# EAGLE board SOCKET_R_PANELISE (EAGLE 9.2.2)
CIRCULAR-LAYOUT-SETTINGS: 0.000000 0.000000 0.238189 -1.000000 0 0
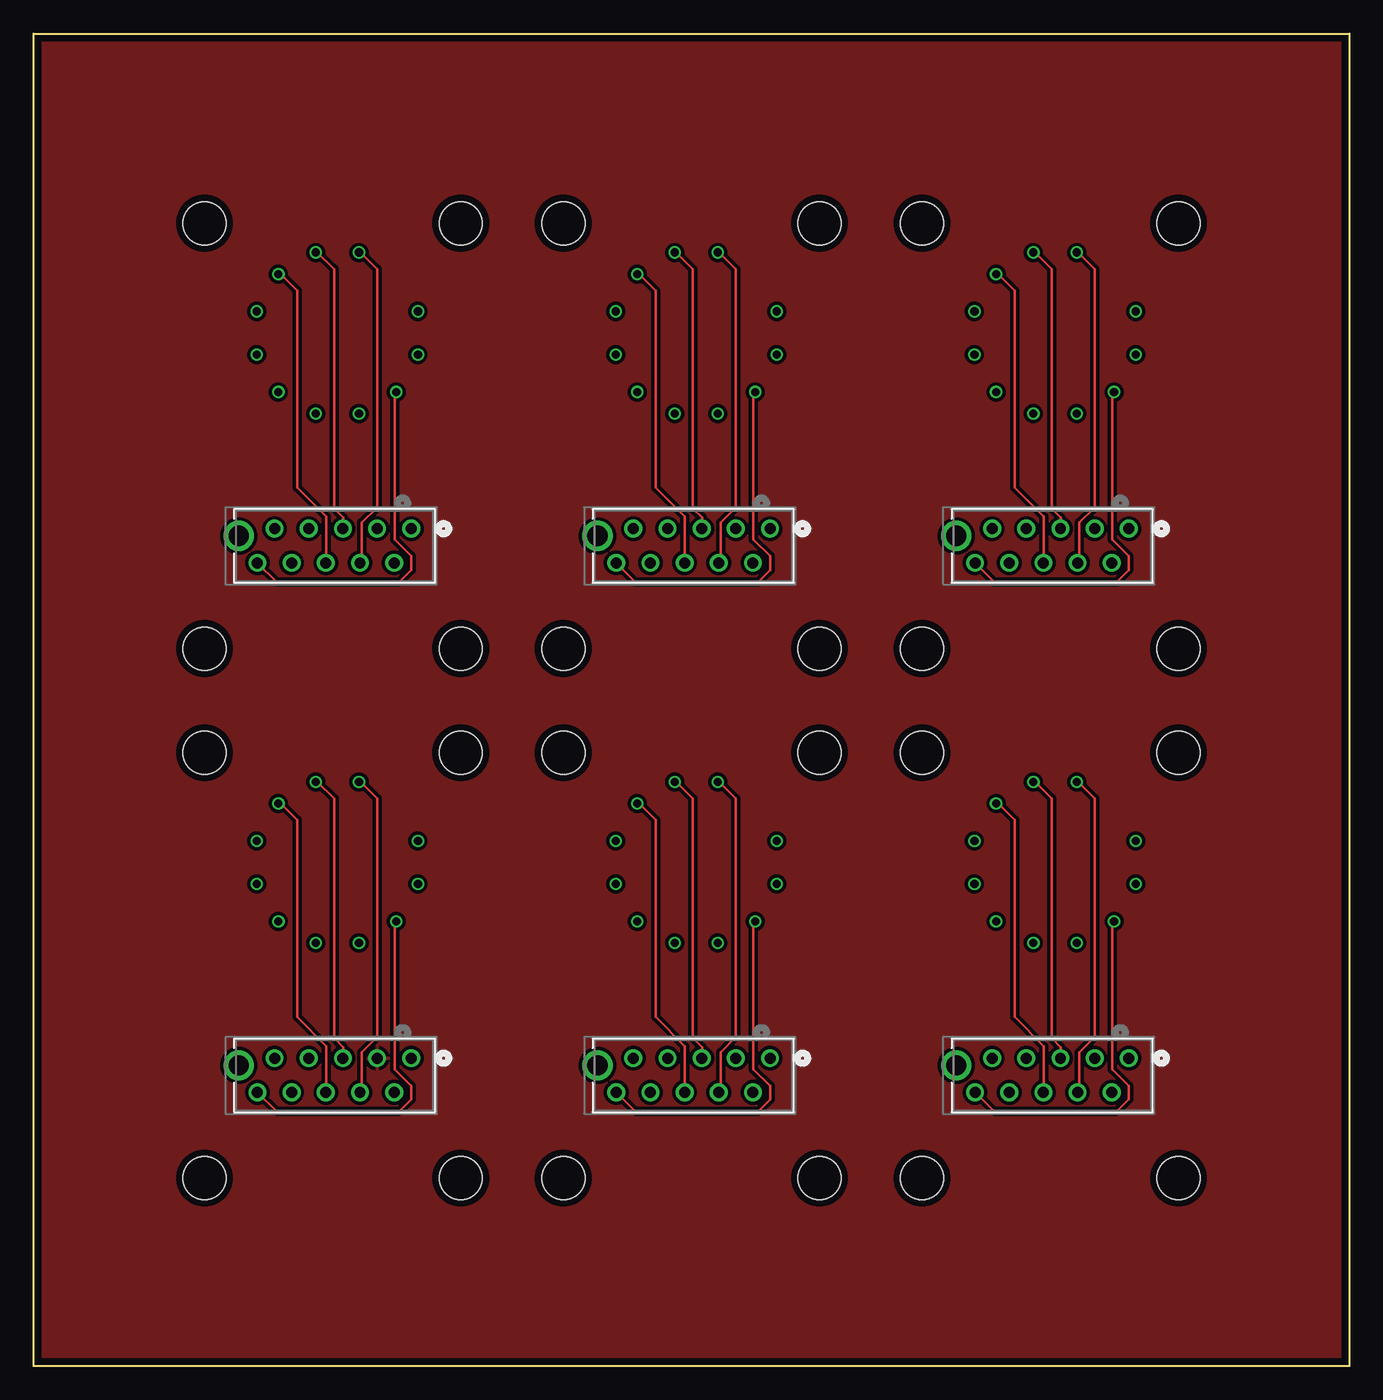
[diagram p0: board, top side]
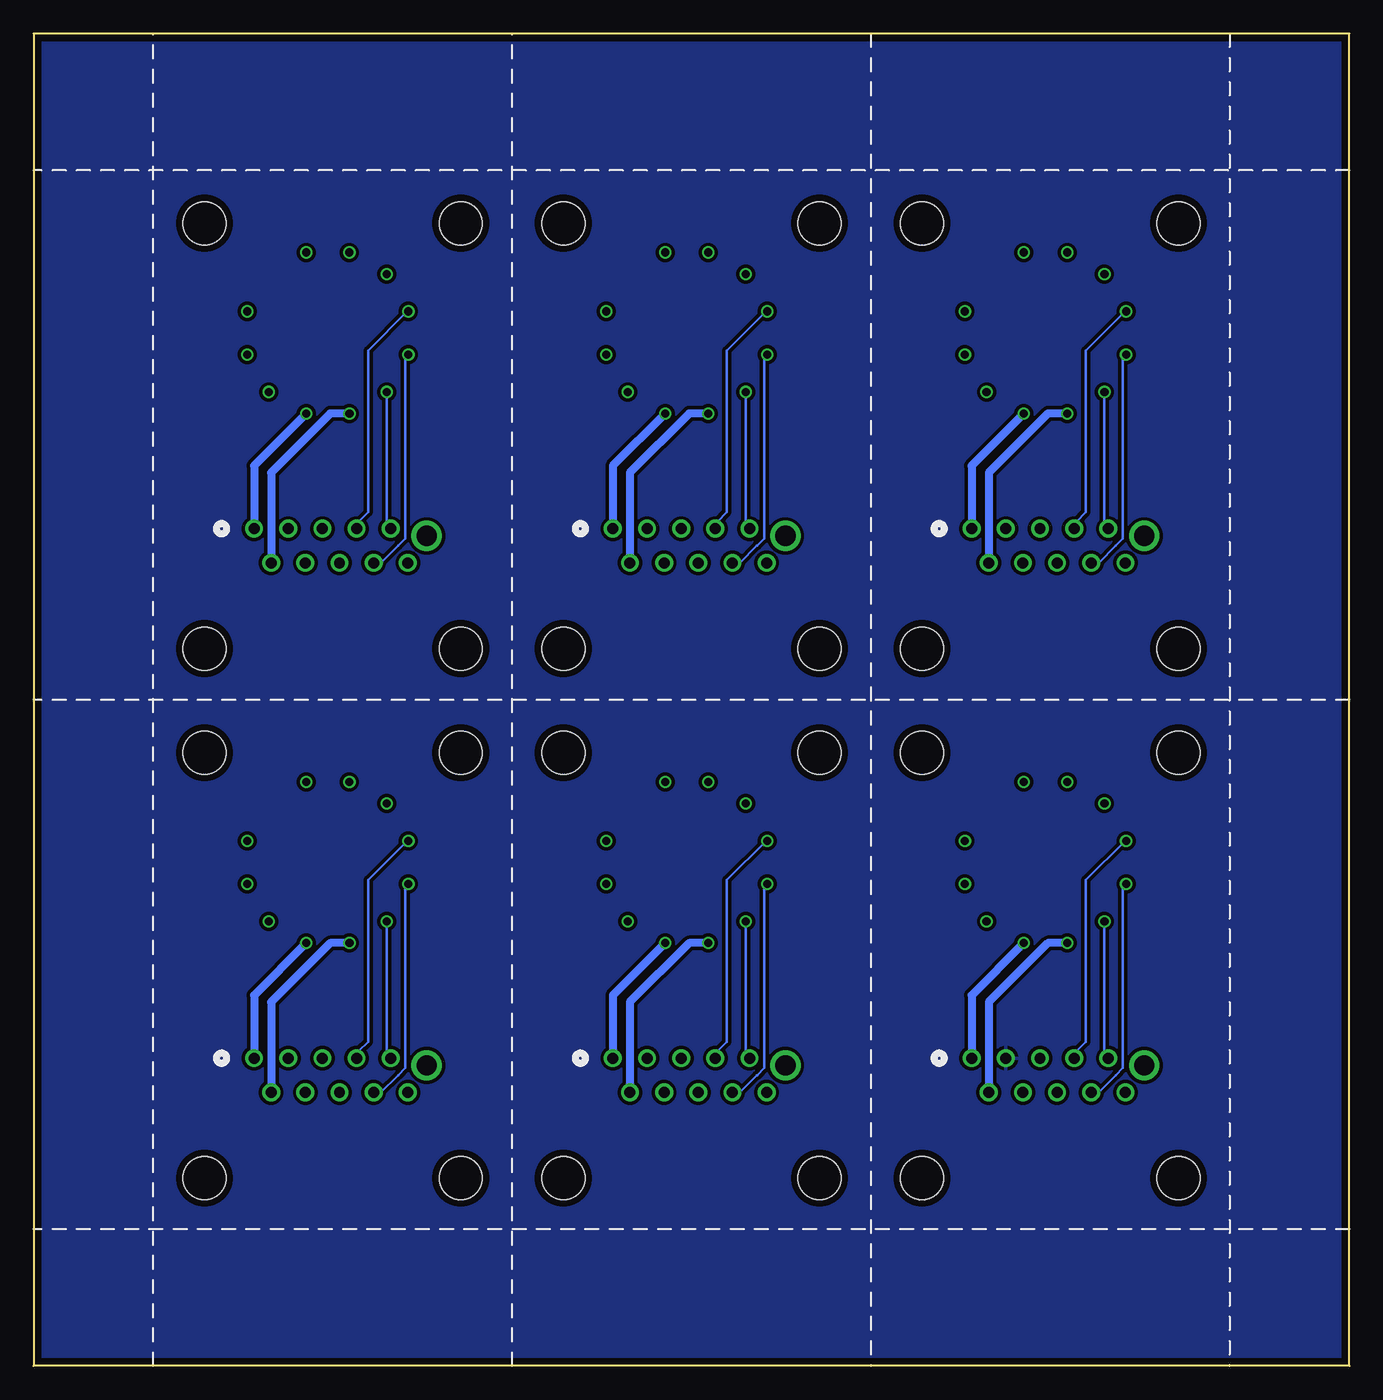
[diagram p1: board, bottom side, seen from below]

Size 97.79 x 99.06 mm. Coordinates in mm from the lower left corner, seen from the top.
Outline: 0,0 97.79,0 97.79,99.06 0,99.06 0,0
Copper layers (1*16): Top 0.035mm / dielectric 1.6mm / Bottom 0.035mm
Design rules "Elecrow_2-layer_PCB_eagle_rule": minimum track width 6mil, minimum drill 12mil, track to track 6mil, track to pad 6mil, pad to pad 6mil, via to via 8mil, smd to smd 0mil, copper to edge 20mil, drill to drill 10mil, minimum pad ring 6mil, minimum via ring 6mil, stop-mask expansion 0mil, vias tented up to drill 100mil, thermal gap 10mil
Net classes: 0 default: width 0.203 mm, clearance 0.254 mm
Holes 3.2 mm at 31.75,13.96 12.7,13.96 31.75,45.59 12.7,45.59 58.42,13.96 39.37,13.96 58.42,45.59 39.37,45.59 85.09,13.96 66.04,13.96 85.09,45.59 66.04,45.59 31.75,53.33 12.7,53.33 31.75,84.96 12.7,84.96 58.42,53.33 39.37,53.33 58.42,84.96 39.37,84.96 85.09,53.33 66.04,53.33 85.09,84.96 66.04,84.96

## Footprints (pad centres in the part's own frame; a part is rotated, then mirrored left to right if it is on the bottom)
CONN10_8-215079-0 = drill 0.813 pad 1.321: 1 0,-0.025; 2 2.54,-0.025; 3 5.08,-0.025; 4 7.62,-0.025; 5 10.16,-0.025; 6 1.27,2.515; 7 3.81,2.515; 8 6.35,2.515; 9 8.89,2.515; 10 11.43,2.515 | drill 1.499 pad 1.499: 11 12.827,0.508
IV-27_R = drill 0.6: 1 -5.962,-1.577; 2 -5.962,1.633; 3 -4.358,4.412; 4 -1.578,6.017; 5 1.631,6.017; 6 4.411,4.412; 7 6.015,1.633; 8 6.015,-1.577; 9 4.411,-4.356; 10 1.631,-5.961; 11 -1.578,-5.961

## Placement (x,y rotation side)
IV-27_R  8-215079-0  [CONN10_8-215079-0]  28.07,22.86 180 top
IV-27_R1  8-215079-0  [CONN10_8-215079-0]  54.74,22.86 180 top
IV-27_R2  8-215079-0  [CONN10_8-215079-0]  81.41,22.86 180 top
IV-27_R3  8-215079-0  [CONN10_8-215079-0]  28.07,62.22 180 top
IV-27_R4  8-215079-0  [CONN10_8-215079-0]  54.74,62.22 180 top
IV-27_R5  8-215079-0  [CONN10_8-215079-0]  81.41,62.22 180 top
U$1  IV-27_R  [IV-27_R]  49.28,37.46 180 top
U$2  IV-27_R  [IV-27_R]  22.61,37.46 180 top
U$3  IV-27_R  [IV-27_R]  75.95,37.46 180 top
U$4  IV-27_R  [IV-27_R]  22.61,76.83 180 top
U$5  IV-27_R  [IV-27_R]  49.28,76.83 180 top
U$6  IV-27_R  [IV-27_R]  75.95,76.83 180 top

## Library data of the parts
IV-27_R IV-27_R1-IV-27_R5 = 8-215079-0; MANUFACTURER_PART_NUMBER: 82150790; VENDOR: TE Connectivity
U$1-U$6 = IV-27_R

## Nets
GND: IV-27_R.2
GND1: IV-27_R1.2
GND2: IV-27_R2.2
GND3: IV-27_R3.2
GND4: IV-27_R4.2
GND5: IV-27_R5.2
GRID1: IV-27_R1.3 U$1.10
GRID2: IV-27_R1.4 U$1.8
GRID3: IV-27_R1.5 U$1.6
GRID4: IV-27_R1.7 U$1.11
GRID5: IV-27_R1.8 U$1.9
GRID6: IV-27_R1.9 U$1.7
GRID7: IV-27_R1.10 U$1.3
GRID8: IV-27_R.4 U$2.8
GRID9: IV-27_R.9 U$2.7
GRID10: IV-27_R.8 U$2.9
GRID11: IV-27_R.7 U$2.11
GRID12: IV-27_R.3 U$2.10
GRID13: IV-27_R.5 U$2.6
GRID14: IV-27_R.10 U$2.3
GRID15: IV-27_R2.3 U$3.10
GRID16: IV-27_R2.4 U$3.8
GRID17: IV-27_R2.5 U$3.6
GRID18: IV-27_R2.7 U$3.11
GRID19: IV-27_R2.8 U$3.9
GRID20: IV-27_R2.9 U$3.7
GRID21: IV-27_R2.10 U$3.3
GRID22: IV-27_R3.3 U$4.10
GRID23: IV-27_R3.4 U$4.8
GRID24: IV-27_R3.5 U$4.6
GRID25: IV-27_R3.7 U$4.11
GRID26: IV-27_R3.8 U$4.9
GRID27: IV-27_R3.9 U$4.7
GRID28: IV-27_R3.10 U$4.3
GRID29: IV-27_R4.3 U$5.10
GRID30: IV-27_R4.4 U$5.8
GRID31: IV-27_R4.5 U$5.6
GRID32: IV-27_R4.7 U$5.11
GRID33: IV-27_R4.8 U$5.9
GRID34: IV-27_R4.9 U$5.7
GRID35: IV-27_R4.10 U$5.3
GRID36: IV-27_R5.3 U$6.10
GRID37: IV-27_R5.4 U$6.8
GRID38: IV-27_R5.5 U$6.6
GRID39: IV-27_R5.7 U$6.11
GRID40: IV-27_R5.8 U$6.9
GRID41: IV-27_R5.9 U$6.7
GRID42: IV-27_R5.10 U$6.3
VFD1: IV-27_R.6 U$2.5
VFD1^: IV-27_R.1 U$2.4
VFD1^1: IV-27_R1.1 U$1.4
VFD1^2: IV-27_R2.1 U$3.4
VFD1^3: IV-27_R3.1 U$4.4
VFD1^4: IV-27_R4.1 U$5.4
VFD1^5: IV-27_R5.1 U$6.4
VFD2: IV-27_R1.6 U$1.5
VFD3: IV-27_R2.6 U$3.5
VFD4: IV-27_R3.6 U$4.5
VFD5: IV-27_R4.6 U$5.5
VFD6: IV-27_R5.6 U$6.5

## Tracks (layer width: path | path; a pad name or v marks a point on that pad's centre or on a via)
GND
  pour Top (isolate 0.254): 0,0 0,99.06 97.79,99.06 97.79,0
  pour Bottom (isolate 0.254): 0,99.06 97.79,99.06 97.79,0 0,0
GRID1
  Top 0.203: U$1.10 47.77,43.42 49,42.19 49,24.38 49.68,23.7 49.68,22.96 IV-27_R1.3
GRID2
  Bottom 0.203: U$1.8 43.34,39.04 46.25,36.12 46.25,24.11 46.94,23.42 46.94,22.96 IV-27_R1.4
GRID3
  Bottom 0.203: U$1.6 44.87,23.14 44.6,22.88 IV-27_R1.5
GRID4
  Top 0.203: U$1.11 50.97,43.42 52.2,42.19 52.2,24.46 51.05,23.32 51.05,20.45 IV-27_R1.7
GRID5
  Top 0.203: U$1.9 45.03,41.82 46.25,40.59 46.25,25.93 48.41,23.77 48.41,20.37 IV-27_R1.8
GRID6
  Bottom 0.203: U$1.7 43.5,35.59 43.5,23.16 43.5,22.14 44.02,21.62 45.3,20.34 IV-27_R1.9
GRID7
  Top 0.203: U$1.3 53.51,32.92 53.51,22.06 54.74,20.83 54.74,19.81 53.85,18.92 44.72,18.92 IV-27_R1.10
GRID8
  Bottom 0.203: U$2.8 16.66,39.04 19.58,36.12 19.58,24.11 20.27,23.42 20.27,22.96 IV-27_R.4
GRID9
  Bottom 0.203: U$2.7 16.83,35.59 16.83,23.16 16.83,22.14 17.35,21.62 18.63,20.34 IV-27_R.9
GRID10
  Top 0.203: U$2.9 18.36,41.82 19.58,40.59 19.58,25.93 21.74,23.77 21.74,20.37 IV-27_R.8
GRID11
  Top 0.203: U$2.11 24.3,43.42 25.53,42.19 25.53,24.46 24.38,23.32 24.38,20.45 IV-27_R.7
GRID12
  Top 0.203: U$2.10 21.09,43.42 22.33,42.19 22.33,24.38 23.01,23.7 23.01,22.96 IV-27_R.3
GRID13
  Bottom 0.203: U$2.6 18.2,23.14 17.93,22.88 IV-27_R.5
GRID14
  Top 0.203: U$2.3 26.84,32.92 26.84,22.06 28.07,20.83 28.07,19.81 27.18,18.92 18.05,18.92 IV-27_R.10
GRID15
  Top 0.203: U$3.10 74.44,43.42 75.67,42.19 75.67,24.38 76.35,23.7 76.35,22.96 IV-27_R2.3
GRID16
  Bottom 0.203: U$3.8 70,39.04 72.92,36.12 72.92,24.11 73.61,23.42 73.61,22.96 IV-27_R2.4
GRID17
  Bottom 0.203: U$3.6 71.53,23.14 71.27,22.88 IV-27_R2.5
GRID18
  Top 0.203: U$3.11 77.64,43.42 78.87,42.19 78.87,24.46 77.72,23.32 77.72,20.45 IV-27_R2.7
GRID19
  Top 0.203: U$3.9 71.7,41.82 72.92,40.59 72.92,25.93 75.08,23.77 75.08,20.37 IV-27_R2.8
GRID20
  Bottom 0.203: U$3.7 70.17,35.59 70.17,23.16 70.17,22.14 70.69,21.62 71.97,20.34 IV-27_R2.9
GRID21
  Top 0.203: U$3.3 80.18,32.92 80.18,22.06 81.41,20.83 81.41,19.81 80.52,18.92 71.39,18.92 IV-27_R2.10
GRID22
  Top 0.203: U$4.10 21.09,82.79 22.33,81.56 22.33,63.75 23.01,63.07 23.01,62.33 IV-27_R3.3
GRID23
  Bottom 0.203: U$4.8 16.66,78.41 19.58,75.49 19.58,63.47 20.27,62.79 20.27,62.33 IV-27_R3.4
GRID24
  Bottom 0.203: U$4.6 18.2,62.51 17.93,62.25 IV-27_R3.5
GRID25
  Top 0.203: U$4.11 24.3,82.79 25.53,81.56 25.53,63.83 24.38,62.69 24.38,59.82 IV-27_R3.7
GRID26
  Top 0.203: U$4.9 18.36,81.19 19.58,79.96 19.58,65.3 21.74,63.14 21.74,59.74 IV-27_R3.8
GRID27
  Bottom 0.203: U$4.7 16.83,74.96 16.83,62.53 16.83,61.51 17.35,60.99 18.63,59.71 IV-27_R3.9
GRID28
  Top 0.203: U$4.3 26.84,72.29 26.84,61.43 28.07,60.2 28.07,59.18 27.18,58.29 18.05,58.29 IV-27_R3.10
GRID29
  Top 0.203: U$5.10 47.77,82.79 49,81.56 49,63.75 49.68,63.07 49.68,62.33 IV-27_R4.3
GRID30
  Bottom 0.203: U$5.8 43.34,78.41 46.25,75.49 46.25,63.47 46.94,62.79 46.94,62.33 IV-27_R4.4
GRID31
  Bottom 0.203: U$5.6 44.87,62.51 44.6,62.25 IV-27_R4.5
GRID32
  Top 0.203: U$5.11 50.97,82.79 52.2,81.56 52.2,63.83 51.05,62.69 51.05,59.82 IV-27_R4.7
GRID33
  Top 0.203: U$5.9 45.03,81.19 46.25,79.96 46.25,65.3 48.41,63.14 48.41,59.74 IV-27_R4.8
GRID34
  Bottom 0.203: U$5.7 43.5,74.96 43.5,62.53 43.5,61.51 44.02,60.99 45.3,59.71 IV-27_R4.9
GRID35
  Top 0.203: U$5.3 53.51,72.29 53.51,61.43 54.74,60.2 54.74,59.18 53.85,58.29 44.72,58.29 IV-27_R4.10
GRID36
  Top 0.203: U$6.10 74.44,82.79 75.67,81.56 75.67,63.75 76.35,63.07 76.35,62.33 IV-27_R5.3
GRID37
  Bottom 0.203: U$6.8 70,78.41 72.92,75.49 72.92,63.47 73.61,62.79 73.61,62.33 IV-27_R5.4
GRID38
  Bottom 0.203: U$6.6 71.53,62.51 71.27,62.25 IV-27_R5.5
GRID39
  Top 0.203: U$6.11 77.64,82.79 78.87,81.56 78.87,63.83 77.72,62.69 77.72,59.82 IV-27_R5.7
GRID40
  Top 0.203: U$6.9 71.7,81.19 72.92,79.96 72.92,65.3 75.08,63.14 75.08,59.74 IV-27_R5.8
GRID41
  Bottom 0.203: U$6.7 70.17,74.96 70.17,62.53 70.17,61.51 70.69,60.99 71.97,59.71 IV-27_R5.9
GRID42
  Top 0.203: U$6.3 80.18,72.29 80.18,61.43 81.41,60.2 81.41,59.18 80.52,58.29 71.39,58.29 IV-27_R5.10
VFD1
  Bottom 0.61: U$2.5 22.41,31.44 26.8,27.05 IV-27_R.6
VFD1^
  Bottom 0.61: U$2.4 28.07,27.56 IV-27_R.1
VFD1^1
  Bottom 0.61: U$1.4 54.74,27.56 IV-27_R1.1
VFD1^2
  Bottom 0.61: U$3.4 81.41,27.56 IV-27_R2.1
VFD1^3
  Bottom 0.61: U$4.4 28.07,66.93 IV-27_R3.1
VFD1^4
  Bottom 0.61: U$5.4 54.74,66.93 IV-27_R4.1
VFD1^5
  Bottom 0.61: U$6.4 81.41,66.93 IV-27_R5.1
VFD2
  Bottom 0.61: U$1.5 49.08,31.44 53.47,27.05 IV-27_R1.6
VFD3
  Bottom 0.61: U$3.5 75.75,31.44 80.14,27.05 IV-27_R2.6
VFD4
  Bottom 0.61: U$4.5 22.41,70.81 26.8,66.42 IV-27_R3.6
VFD5
  Bottom 0.61: U$5.5 49.08,70.81 53.47,66.42 IV-27_R4.6
VFD6
  Bottom 0.61: U$6.5 75.75,70.81 80.14,66.42 IV-27_R5.6